# Altium PCB Board.PcbDoc
Units mm, origin at the board's own origin, x right, y up, seen from the top; angles counter-clockwise.
Board outline 40 x 40 mm, 2 copper layers (Top Layer, Bottom Layer); 19 components, 15 nets, 61 pads, 0 vias.
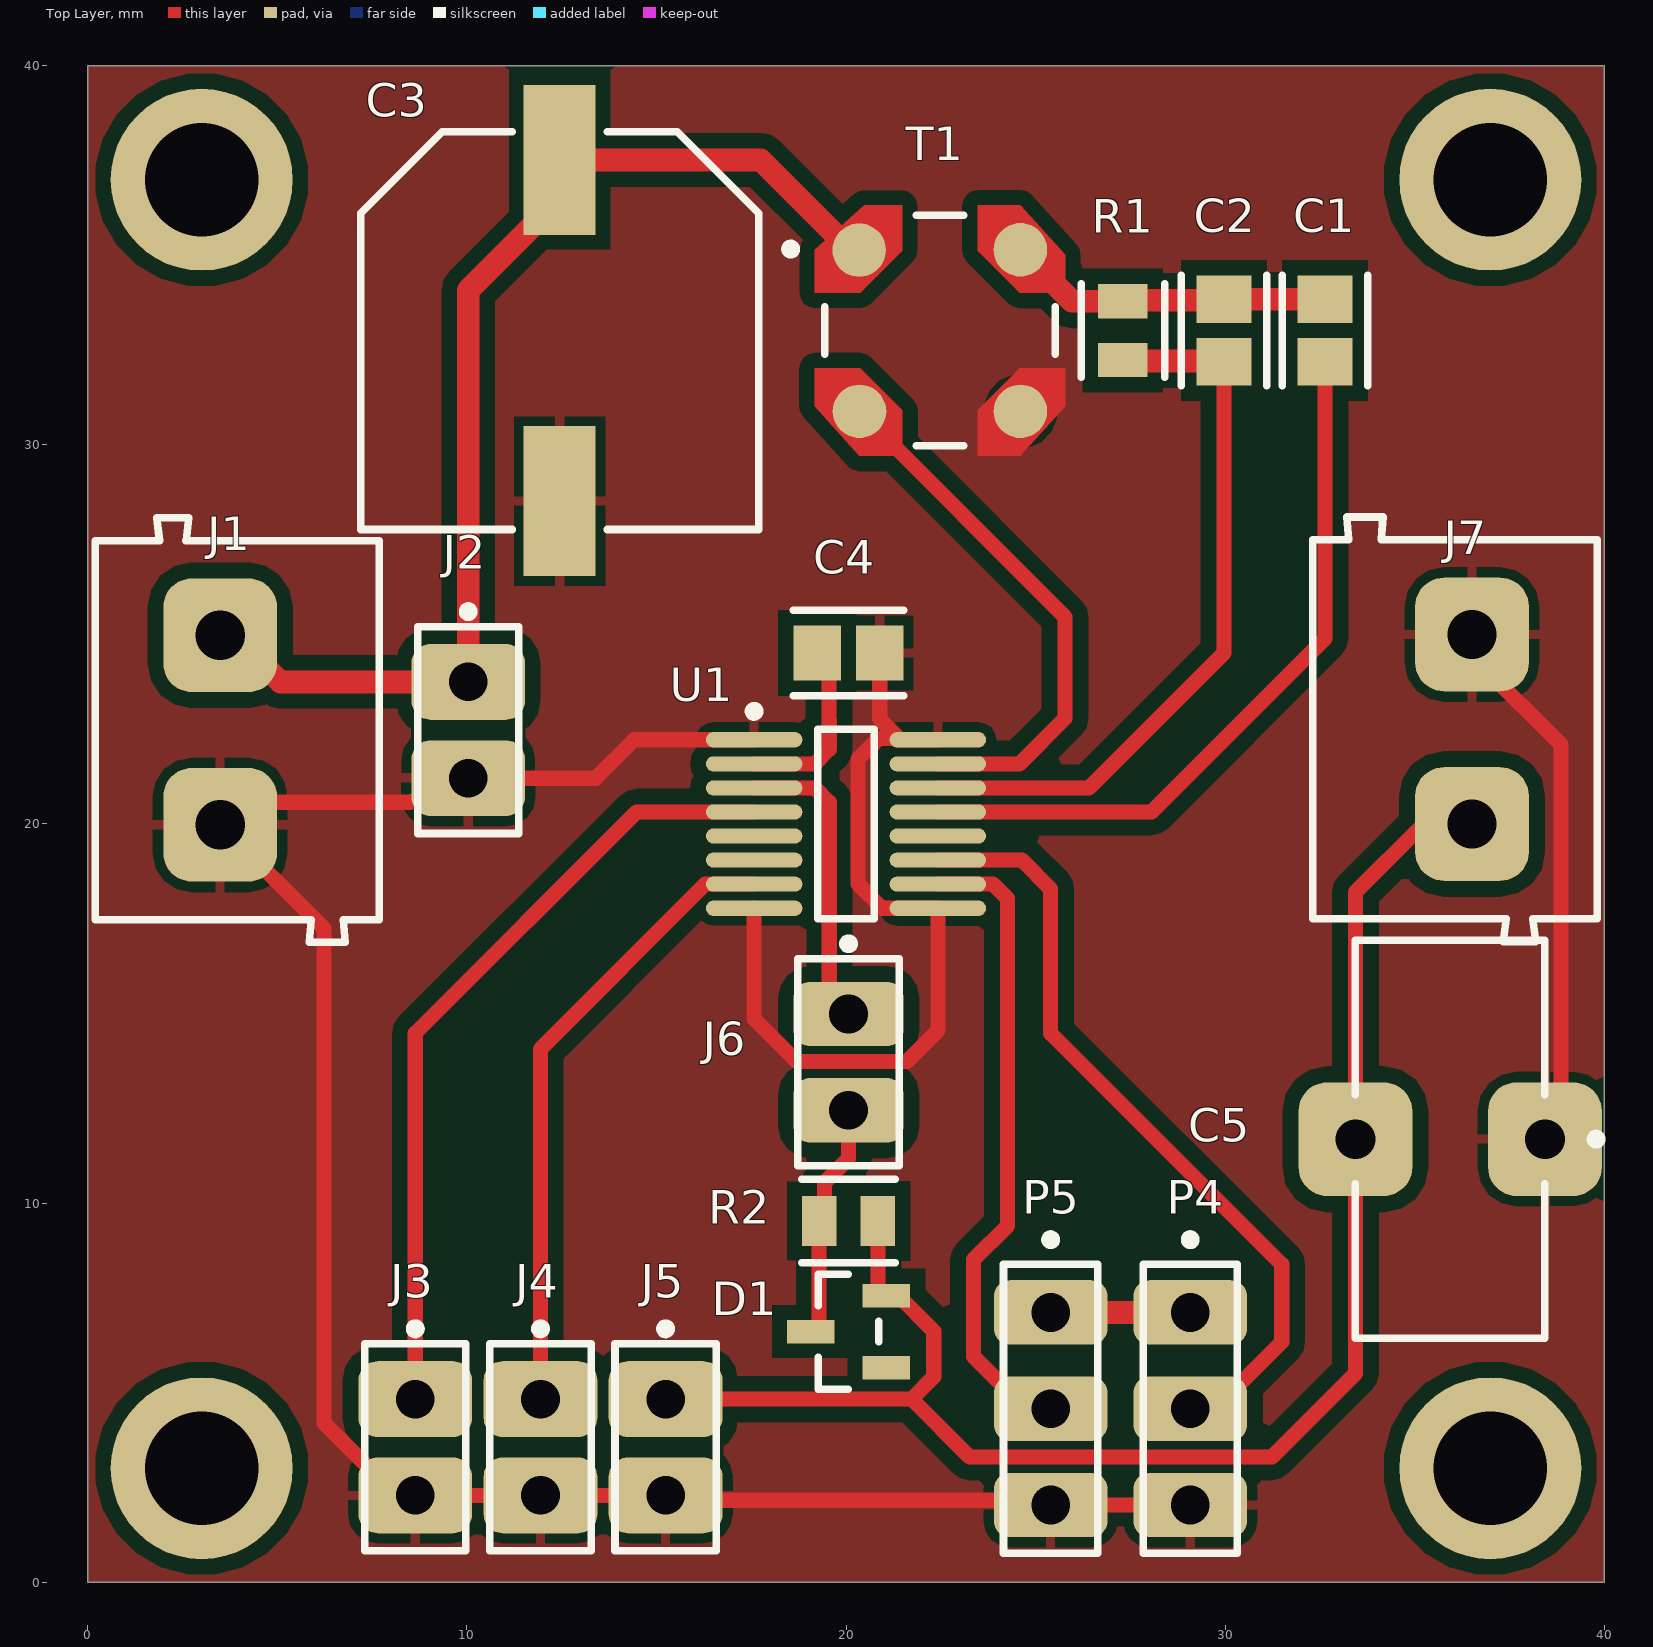
[diagram p0: Top Layer view]
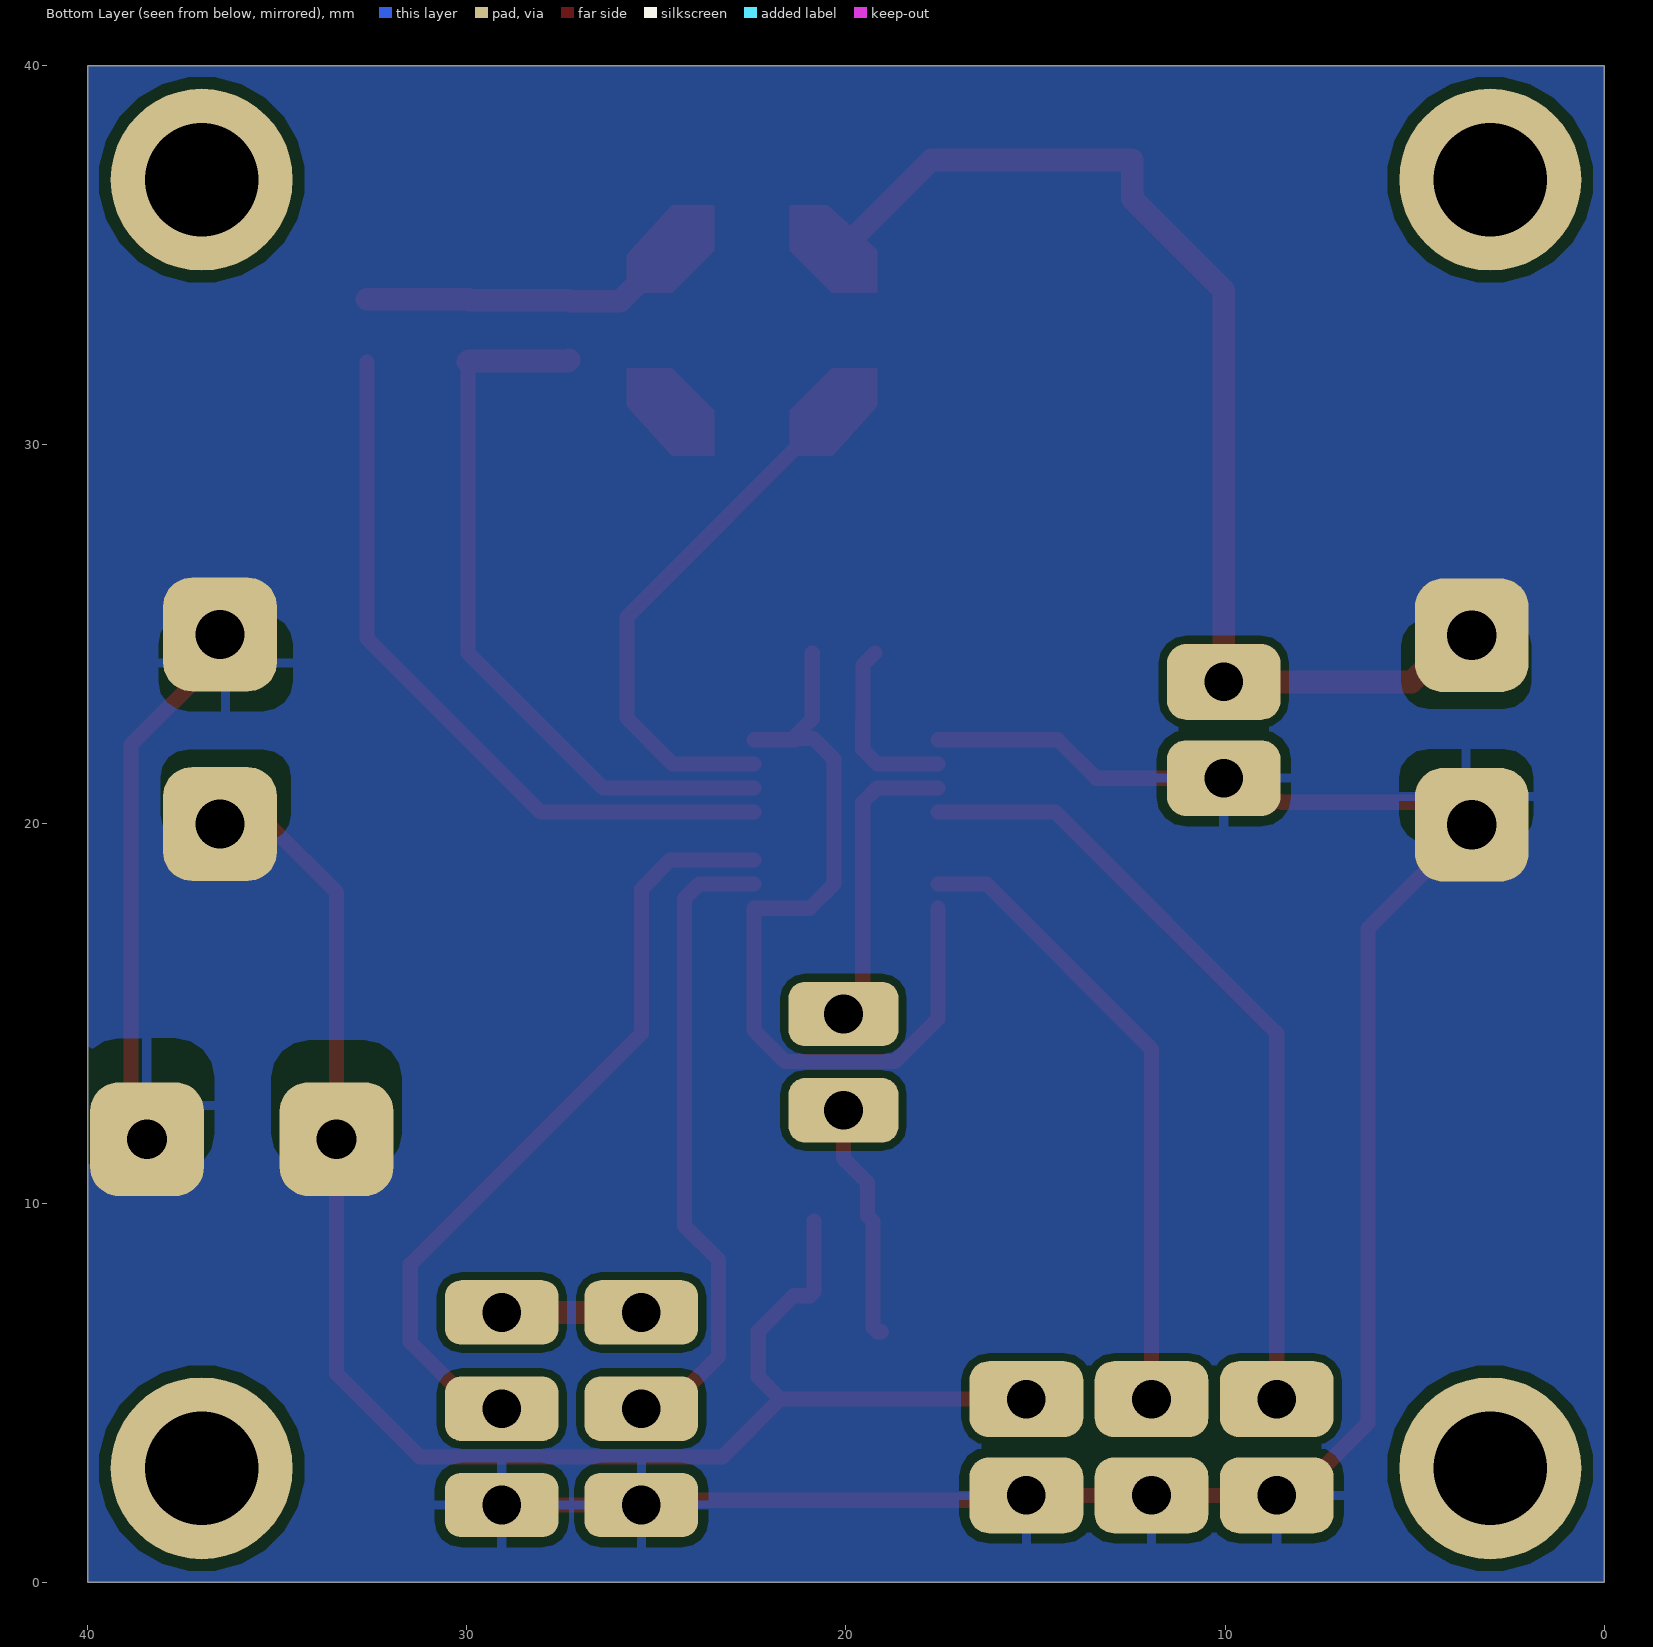
[diagram p1: Bottom Layer view, seen from below]
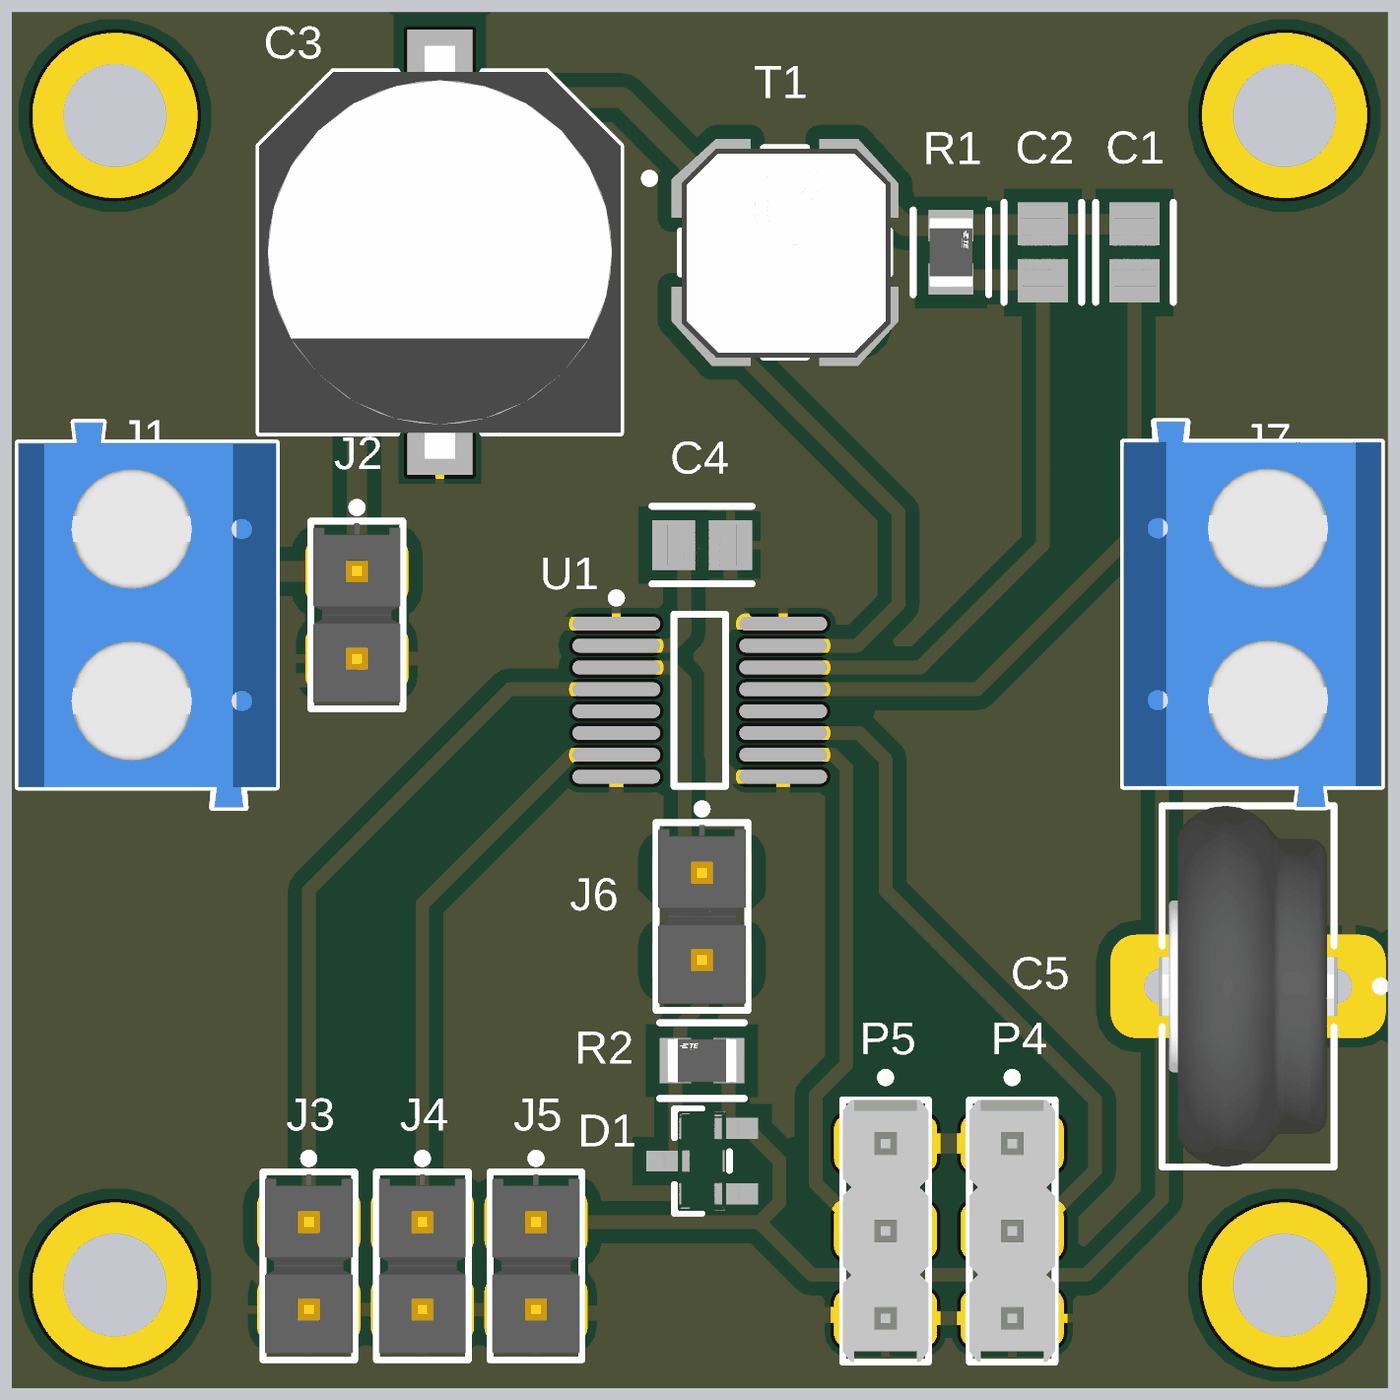
[diagram p2: 3D render of the assembled board from above, using the file's embedded part models]

## Layer stack, top to bottom
Top Solder: solder mask 0.0102, Solder Resist, Dk 3.5
Top Layer: signal copper 0.0356
Dielectric 1: dielectric 0.32, FR-4, Dk 4.8
Bottom Layer: signal copper 0.0356
Bottom Solder: solder mask 0.0102, Solder Resist, Dk 3.5

## Board outline
0,0 0,40 40,40 40,0

## Design rules (kind name [scope] priority, off if disabled: settings)
Clearance [All] p1: gap=0.4 ignorepadtopadclearanceinfootprint=FALSE
PolygonConnect [All] p1: connectstyle=Relief reliefconductorwidth=0.254 reliefentries=4 polygonreliefangle="90 Angle" airgapwidth=0.254
RoutingVias [All] p1: holewidth=0.711 width=1.27 viastyle="Through Hole" minholewidth=0.711 minwidth=1.27 maxholewidth=0.711 maxwidth=1.27
SolderMaskExpansion [All] p1: expansion=0.102 istentingtop=FALSE
Width [All] p1: maxlimit=0.6 minlimit=0.254 preferedwidth=0.4
30 further rules are at their usual default settings.

## Components (designator, comment, footprint, x,y, rotation, side; value= is the part's Value field where it differs from the comment)
C1 "1nF" FP-CL21-IPC_B 32.639,33.02 r270 top
C2 "330pF" FP-CL21-IPC_B 29.972,33.02 r270 top
C3 "330uF" PNSC-EEE-FK1V331P_L 12.446,33.02 r270 top
C4 "10uF" FP-CL21-IPC_B 20.066,24.511 r0 top
C5 "EECS0HD224V" FP-EECS0HD224V-MFG 35.941,11.684 r180 top
D1 "BAR43SFILM" FP-SOT23-3L-MFG 20.066,6.604 r180 top value=7pF
J1 "TEG" 691102710002 3.937,22.479 r270 top
J2 "TEG_test" FP-TSW-102-07-L-S-MFG#1 10.033,22.479 r270 top
J3 "VOUT" FP-TSW-102-07-L-S-MFG#1 8.636,3.556 r270 top
J4 "PGD" FP-TSW-102-07-L-S-MFG#1 11.938,3.556 r270 top
J5 "Vstore_test_V" FP-TSW-102-07-L-S-MFG#1 15.24,3.556 r270 top
J6 "Vstore_test_I" FP-TSW-102-07-L-S-MFG#2 20.066,13.716 r270 top
J7 "SuperCap" 691102710002 36.068,22.5 r90 top
P4 "VS1 JMP" MOLX-22-28-4033_V 29.083,4.572 r270 top
P5 "VS2 JMP" MOLX-22-28-4033_V 25.4,4.572 r270 top
R1 "500k" FP-RP732A-IPC_C 27.305,33.02 r270 top
R2 "0R" FP-RP732A-IPC_C 20.066,9.525 r0 top
T1 "LPR6235-253LMLB" FP-LPR6235-MFG 22.479,33.02 r0 top
U1 "LTC3108EGN#PBF" LT-GN-16_M 20,20 r0 top

## Footprints (in the part's own frame and the unit in brackets; to place one, negate y for a bottom-side part, rotate by r counter-clockwise, add the part's x,y. Pads: shape width x height; smd on the part's side, far side on the other; paste and mask are expansions set on the pad)
691102710002 [mm] "5,00mm - modular - blue - Horizontal entry with pressure clamp - 9,9 mm height - 02p"
  rrect50% 3x3 hole 1.3: 1(-2.5,-0.45) 2(2.5,-0.45)
  silkscreen extent -5.6,-3.75 5.6,3.75, body extent -5.6,-3.75 5.6,3.75, height 9.96
FP-CL21-IPC_B [mm]
  rect 1.255x1.456 smd paste+0 mask+0: 1(-0.826,0) 2(0.826,0)
  silkscreen extent -1.45,-1.13 1.45,1.13, body extent -1.7,-0.98 1.7,0.98, height 0.25
FP-EECS0HD224V-MFG [mm]
  rrect50% 3x3 hole 1.05 paste-1000 mask+0: 1(-2.5,0) 2(2.5,0)
  silkscreen extent -3.98,-5.25 2.5,5.25, body extent -3.4,-5.35 3.4,5.35, height 0.25
FP-LPR6235-MFG [mm]
  round 1.413 smd paste+0 mask+0: 1(-2.131,2.123) 2(-2.123,-2.131) 3(2.123,-2.131) 4(2.123,2.131)
  Top Layer region: -3.3,-1 -2.1,-1 -1,-2.1 -1,-3.3 -2.125,-3.3 -3.3,-2 -3.3,-1
  Top Layer region: 3.3,-1 2.1,-1 1,-2.1 1,-3.3 2.125,-3.3 3.3,-2 3.3,-1
  Top Layer region: 3.3,1 2.1,1 1,2.1 1,3.3 2.125,3.3 3.3,2 3.3,1
  Top Layer region: -1,3.3 -1,2.1 -2.1,1 -3.3,1 -3.3,2.125 -2,3.3 -1,3.3
  silkscreen extent -4.06,-3.04 3.04,3.04, body extent -3.4,-3.4 3.4,3.4, height 0.25
FP-RP732A-IPC_C [mm]
  rect 0.906x1.308 smd paste+0 mask+0: 1(-0.776,0) 2(0.776,0)
  silkscreen extent -1.23,-1.1 1.23,1.1, body extent -1.33,-0.8 1.33,0.8, height 0.25
FP-SOT23-3L-MFG [mm]
  rect 1.26x0.61 smd paste+0 mask+0: 1(-0.995,0.95) 2(-0.995,-0.95) 3(0.995,0)
  silkscreen extent -0.8,-1.52 0.8,1.52, body extent -1.73,-1.62 1.73,1.62, height 0.25
FP-TSW-102-07-L-S-MFG#1 [mm]
  rrect50% 2x3 hole 1.02 paste-1000 mask+0: 1(-1.27,0) 2(1.27,0)
  silkscreen extent -3.25,-1.34 2.73,1.34, body extent -2.83,-1.44 2.83,1.44, height 0.25
FP-TSW-102-07-L-S-MFG#2 [mm]
  rrect50% 1.7x2.9 hole 1.02 paste-1000 mask+0: 1(-1.27,0) 2(1.27,0)
  silkscreen extent -3.25,-1.34 2.73,1.34, body extent -2.83,-1.44 2.83,1.44, height 0.25
LT-GN-16_M [mm] "SOP, 16-Leads, Body 5x4mm, Pitch 0.635mm, IPC Low Density"
  oval 2.55x0.4 smd: 1(-2.425,2.222) 2(-2.425,1.587) 3(-2.425,0.953) 4(-2.425,0.318) 5(-2.425,-0.318) 6(-2.425,-0.953) 7(-2.425,-1.587) 8(-2.425,-2.222) 9(2.425,-2.222) 10(2.425,-1.587) 11(2.425,-0.953) 12(2.425,-0.318) 13(2.425,0.318) 14(2.425,0.953) 15(2.425,1.587) 16(2.425,2.222)
  silkscreen extent -2.55,-2.5 0.75,3.1, body extent -2,-2.5 2,2.5, height 1.75
MOLX-22-28-4033_V [mm] "THD, 3-Leads, Body 7.62x2.49mm, Pitch 2.54mm"
  rrect50% 1.7x3 hole 1.02: 1(-2.54,0) 2(0,0) 3(2.54,0)
  silkscreen extent -4.58,-1.24 3.81,1.24, body extent -3.81,-1.24 3.81,1.24, height 8.38
PNSC-EEE-FK1V331P_L [mm] "CAPAE, 2-Leads, Body 10.5x10.5mm, IPC High Density"
  rect 3.95x1.9 smd: 1(-4.5,0) 2(4.5,0)
  silkscreen extent -5.25,-5.25 5.25,5.25, body extent -6,-5.25 6,5.25, height 10.5

## Part data
C1 C2 C4: library part CMP-13271-001454-1, "CL21 Series 0805 22uF 6.3V ±20% Tolerance X5R Multilayer Ceramic Chip Capacitor", Capacitance=22uF, Case Code (Imperial)=0805, Case Code (Metric)=2012, Dielectric=X5R, Max Operating Temperature=85°C, Min Operating Temperature=-55°C, Package Quantity=1, Tolerance=20%, Voltage Rating=6.3V, Case/Package=0805, Depth=1.25mm, Height=0.85mm, Lead Free="Lead Free", Length=2mm, Mount="Surface Mount", Packaging="Tape and Reel", Radiation Hardening=No, Thickness=0.037inch, Width=0.049inch
C3: library part CMP-2000-06212-1, "Aluminum Electrolytic Capacitor, 330 uF, 35 V, -55 to 105 degC, 2-Pin CAPAE, RoHS, Tape and Reel", Capacitance=330µF, Case Size/Dimension=Ø10x10.2mm, Lifetime@Temperature=2000Hrs@105°C, Manufacturer=Panasonic, Operating Temp Range=-55to+105°C, Operating Temp-Max=105°C, Package Description="2-Pin Capacitor Aluminum Electrolytic, Body 10.3 x 10.3 mm, Height 10.5 mm", Package Reference=EEE-FK1V331P, Rated Voltage=35V, Ripple Current=850mA, Datasheet URL=https://datasheet.ciiva.com/29313/443481-da-01-en-smd-elko-vfk-g-330-uf-35v-29313592.pdf, Datasheet Version=07/2008, Impedance=0.08O, Manufacturer URL=http://www.panasonic.com/, Mounting Technology=SurfaceMount, Series=FK, Type=Can
C5: library part CMP-05436-000001-1, "CAP 220MF -20% +80% 5.5V T/H", Capacitance=220mF, Case/Package=Radial, Dielectric Material=Aluminium, ESR (Equivalent Series Resistance)=75R, Max Operating Temperature=70°C, Min Operating Temperature=-25°C, Package Quantity=200, Tolerance=80%, Voltage=500V, Voltage Rating=5.5V, Body Diameter=10.5mm, Construction=Cylindrical, Depth=5mm, Diameter=10.5mm, Height=11.5mm, Height - Seated (Max)=0.453inch, Lead Diameter=0.8mm, Lead Free="Lead Free", Lead Length=3mm, Lead Pitch=5mm, Length=11.5mm, Life (Hours)=1000Hour, Mount="Through Hole", Packaging=Bulk, Radiation Hardening=No, REACH SVHC="No SVHC", RoHS Compliant=Yes, Series=SD, Termination="Through Hole", Voltage Rating (DC)=5.5V, Width=5mm
D1: library part CMP-2000-05915-2, "DIODE ARRAY SCHOTTKY 30V SOT23-3", Capacitance=7pF, Forward Current=0.1A, Manufacturer=STMicroelectronics, Max Junction Temp=+150°C, Max Repetitive Reverse Voltage=30V, Max Surge Forward Current=0.75A, Package=SOT23-3L, Peak Reverse Current=0.5uA, Temperature="to +150°C", Automotive=No, Category=Diode, ComponentLink2Description=Datasheet, ComponentLink2URL=https://www.st.com/resource/en/datasheet/bar43.pdf, Device Class L1="Discrete Semiconductors", Device Class L2=Diodes, Device Class L3="Schottky Diodes", Digikey Description="DIODE ARRAY SCHOTTKY 30V SOT23-3", Height=1.5mm, Lead Free=Yes, Manufacturer Part Number=BAR43SFILM, Mouser Description="Schottky Diodes & Rectifiers 100mA 30 Volt", Octopart=https://octopart.com/bar43sfilm-stmicroelectronics-39549077, RoHS=TRUE, Standoff Height=0mm, Temperature Range High=+150°C
J1 J7: library part CMP-1502-03258-1, "Series 102 - 5.00 mm Horizontal Entry Modular with Pressure Clamp WR-TBL, 2 pin", Manufacturer="Wurth Elektronik", Operating Temperature=-40to105degC, Package Reference=691102710002, Datasheet URL=http://katalog.we-online.de/em/datasheet/6911027100xx.pdf, Manufacturer URL=http://www.we-online.de, Mounting Technology=THT, Packaging=Box, Part Number=691102710002, Pin Number=2, Pitch=5.00mm, Publisher=WurthElektronik
J2 J3 J4 J5 J6: library part CMP-02766-001428-1, "CONN HEADER VERT 2POS 2.54MM", Color=Black, Current Rating=7.6A, Max Operating Temperature=125°C, Max Voltage Rating (AC)=550V, Min Operating Temperature=-55°C, Package Quantity=1, Connector Type="Male Pin", Contact Material=Bronze, Contact Mating Length=0.23inch, Contact Plating=Gold, Contact Type="Male Pin", Depth=2.54mm, Gender=Male, Housing Color=Black, Housing Material=Polyester, Lead Free="Lead Free", Length=5.08mm, Max Current Rating=7.6A, Mount="Through Hole", Number of Contacts=2, Number of Positions=2, Number of Rows=1, Orientation=Straight, Packaging=Bulk, Pitch=2.54mm, Radiation Hardening=No, REACH SVHC="No SVHC", RoHS Compliant=Yes, Series=TSW, Termination=Solder, Voltage Rating=550V, Width=2.54mm
P4 P5: library part CMP-1676-00001-5, "Male Header, Pitch 2.54 mm, 1 x 3 Position, Height 8.38 mm, Tail Length 3.18 mm, RoHS, Bulk", Colour=Black, Current Rating="4 A", Manufacturer=Molex, Max Operating Temperature="75 degC", Min Operating Temperature="0 degC", Package Quantity=1, Voltage Rating="250 V", ComponentLink1Description="Manufacturer URL", ComponentLink1URL=http://www.molex.com/, ComponentLink2Description=Datasheet, ComponentLink2URL=http://www.molex.com/pdm_docs/sd/022284033_sd.pdf, Contact Finish=Gold, Contact Material=Brass, Contact Plating=Gold, DatasheetVersion="Rev. G, 01/2012", Height="8.38 mm", Lead Pitch="0.1 inch", Length="7.62 mm", Mount="Through Hole", Mounting Technology="Through Hole", PackageDescription="Male Header, Pitch 2.54 mm, 1 x 3 Position, Height 8.38 mm, Tail Length 3.18 mm", PackageReference=22-28-4033, Packaging=Bulk, Pins=3, REACH SVHC=Unknown, RoHSCompliant=true, Rows=1
R1 R2: library part CMP-03211-009539-2, "Surface Mount Resistors, Precision Resistor, 2 Terminations, Size Code 0805, Cut Tape Length, .1%, Thin Film, 10K 0.1% 10PPM", Case Code (Imperial)=0805, Case Code (Metric)=2012, Max Operating Temperature=155°C, Min Operating Temperature=-55°C, Number of Resistors=1, Package Quantity=1000, Power Rating=125mW, Resistance=39.2kR, Temperature Coefficient=15ppm/°C, Tolerance=0.1%, Voltage Rating=150V, Case/Package=0805, ELV=Compliant, Height=0.55mm, Length=2mm, Mount="Surface Mount", Number of Terminations=2, Packaging="Tape and Reel", Termination=Solder, Weight=0.000194oz, Width=1.25mm
T1: library part CMP-11284-000017-1, "Coupled Inductors Mini Step-up Xfmr SEE PART COMMENT TAB", Ambient Temperature Range High=+85°C, Ambient Temperature Range Low=-40°C, Frequency=100kHz, Inductance Primary=25uH, Isolation Voltage=300Vrms, Manufacturer=Coilcraft, Package=LPR6235, Primary Resistance=0.74Ω, Sec Resistance=13.7Ω, Automotive=No, Category=Trans, ComponentLink2Description=Datasheet, ComponentLink2URL=https://www.coilcraft.com/pdfs/lpr6235.pdf, Device Class L1="Passive Components", Device Class L2=Transformers, Device Class L3=unset, Height=3.5mm, Lead Free=Yes, Manufacturer Part Number=LPR6235-253LMLB, Mouser Description="Coupled Inductors Mini Step-up Xfmr SEE PART COMMENT TAB", Octopart=https://octopart.com/lpr6235-253lmlb-coilcraft-14935593, RoHS=TRUE, Turns Ratio=1:10
U1: library part CMP-0473-00093-1, "Ultralow Voltage Step-Up Converter and Power Manager, 16-pin SOP (GN-16), -40 to 125 degC, Pb-Free", Manufacturer="Linear Technology", ComponentLink1Description="Manufacturer URL", ComponentLink1URL=http://www.linear.com/, ComponentLink2Description=Datasheet, ComponentLink2URL=http://cds.linear.com/docs/en/datasheet/3108fb.pdf, ComponentLink3Description="Package Specification", ComponentLink3URL=http://cds.linear.com/docs/en/packaging/05081641_B_GN16.pdf, DatasheetVersion="Rev. B", Energy Source=Thermoelectric, Mounting Technology="Surface Mount", Number of Outputs=3, PackageDescription="16-Pin Plastic SSOP, Body 4.9 x 3.9 mm, Pitch 0.635 mm", PackageReference=GN-16, PackageVersion="Rev. B, 03/2012", PartNumber=LTC3108EGN#PBF, RoHS=TRUE, Topology="Boost, LDO", Vin Max(V)=0.5, Vin Min(V)=0.02, Vout Max(V)=5

## Free pads (board coordinates)
  round 4.8 hole 3: 5(3,3) 5(3,37) 5(37,3) 5(37,37)

## Nets (pads, with @x,y where several pads share a name; then routed paths per layer and width w, separated by ;. In a path a pad name is that pad's centre, name@x,y a point inside that pad or via, vN(x,y) a via of type N, cw(c..) or ccw(c..) an arc to the next point about the centre after c; other vN are vias at no path point)
GND: C3.2 C4.2 C5.1 J1.2 J2.2 J3.2 J4.2 J5.2 J7.2 P4.3 P5.3 T1.3 U1.1 U1.8 U1.9 U1.16 | length 91.3
  Top Layer w0.4: J1.2@3.738,20.538 J1.2@4.046,20.538 ; U1.8 17.575,14.86 18.699,13.736 21.61,13.736 22.425,14.551 U1.9 20.957,17.778 20.32,18.415 20.32,21.717 20.856,22.253 U1.16@21.319,22.253 ; U1.1 14.412,22.223 13.398,21.209 J2.2 9.418,20.594 8.519,20.594 8.499,20.574 4.082,20.574 J1.2 6.223,17.243 6.223,4.199 8.136,2.286 J3.2 J4.2 J5.2 15.367,2.159 25.273,2.159 P5.3 P4.3 ; C4.2 20.892,22.77 21.35,22.311 21.35,22.223 U1.16 ; J7.2@36.368,24.25 36.706,24.25 38.862,22.094 38.862,12.994 C5.1@38.441,12.573
NetC1_1: C1.1 C2.1 R1.1 T1.4 | length 8.6
  Top Layer w0.6: T1.4 25.957,33.796 R1.1 27.33,33.821 29.947,33.821 C2.1 C1.1
NetC1_2: C1.2 U1.13 | length 19.4
  Top Layer w0.4: U1.13 28.065,20.318 32.639,24.892 C1.2
NetC2_2: C2.2 R1.2 U1.14 | length 19.4
  Top Layer w0.4: U1.14 26.414,20.953 29.972,24.511 C2.2
  Top Layer w0.6: R1.2 27.33,32.219 29.947,32.219 C2.2
NetC3_1: C3.1 J1.1 J2.1 T1.1 | length 30.7
  Top Layer w0.6: J1.1 3.85,24.979 5.08,23.749 J2.1 10.033,23.999 10.033,34.082 12.446,36.495 C3.1 17.751,37.52 20.128,35.143 T1.1
NetC4_1: C4.1 U1.2 | length 4.8
  Top Layer w0.4: U1.2 19.175,21.588 19.558,21.971 19.558,22.733 19.548,22.743 19.548,24.203 C4.1
NetC5_2: C5.2 D1.2 J5.1 J7.1 R2.2 | length 42.3
  Top Layer w0.4: J5.1 21.734,4.826 ; R2.2 20.842,7.659 20.947,7.554 D1.2 21.386,7.554 22.313,6.627 22.313,5.406 21.734,4.826 ; J7.1@36.368,20.75 36.368,20.562 35.743,19.937 35.177,19.937 33.441,18.201 33.441,12.573 33.441,5.501 31.242,3.302 23.258,3.302 21.734,4.826
NetD1_3: D1.3 J6.2 R2.1 | length 6.3
  Top Layer w0.4: D1.3 19.185,6.604 19.29,6.709 R2.1 19.43,9.665 19.43,10.54 20.066,11.176 J6.2
NetJ3_1: J3.1 U1.4 | length 21
  Top Layer w0.4: J3.1 8.636,14.478 14.476,20.318 U1.4
NetJ4_1: J4.1 U1.7 | length 16.7
  Top Layer w0.4: J4.1 11.938,14.064 16.286,18.413 U1.7
NetJ6_1: J6.1 U1.3 | length 7.9
  Top Layer w0.4: U1.3 19.179,20.953 19.558,20.574 19.558,15.494 J6.1
NetT1_2: T1.2 U1.15 | length 14.2
  Top Layer w0.4: T1.2 25.781,25.464 25.781,22.79 24.579,21.588 U1.15
VAUX: P4.1 P5.1 | length 3.7
  Top Layer w0.6: P5.1 P4.1
VS1: P4.2 U1.11 | length 20.9
  Top Layer w0.254: U1.11 U1.11@22.444,19.066
  Top Layer w0.4: U1.11 24.64,19.048 25.4,18.288 25.4,14.478 31.496,8.382 31.496,6.335 29.733,4.572 P4.2
VS2: P5.2 U1.10 | length 17
  Top Layer w0.4: U1.10 23.878,18.413 24.257,18.034 24.257,9.398 23.368,8.509 23.368,5.954 24.75,4.572 P5.2
pads on no net: D1.1 U1.5 U1.6 U1.12

## Polygon pours and split planes (outlines as drawn)
GND on Top Layer "NONET_L-01_P-001" (solid, remove dead copper, pour order 0): 0,0 40,0 40,40 0,40
GND on Bottom Layer "NONET_L-01_P-001" (solid, remove dead copper, pour order 1): 0,0 40,0 40,40 0,40

## Silkscreen, mask and mechanical layers (free items; w line width, h text height)
Mechanical 1:
  the board outline again, w0.254